# Altium PCB PCB-watch-V2.2.PcbDoc
Units mil, origin at the board's own origin, x right, y up, seen from the top; angles counter-clockwise.
Board outline 1043.31 x 1259.84 mil, 4 copper layers (Top Layer, GND, POWER, Bottom Layer), stack 23.756 mil thick; 99 components, 97 nets, 409 pads, 155 vias.
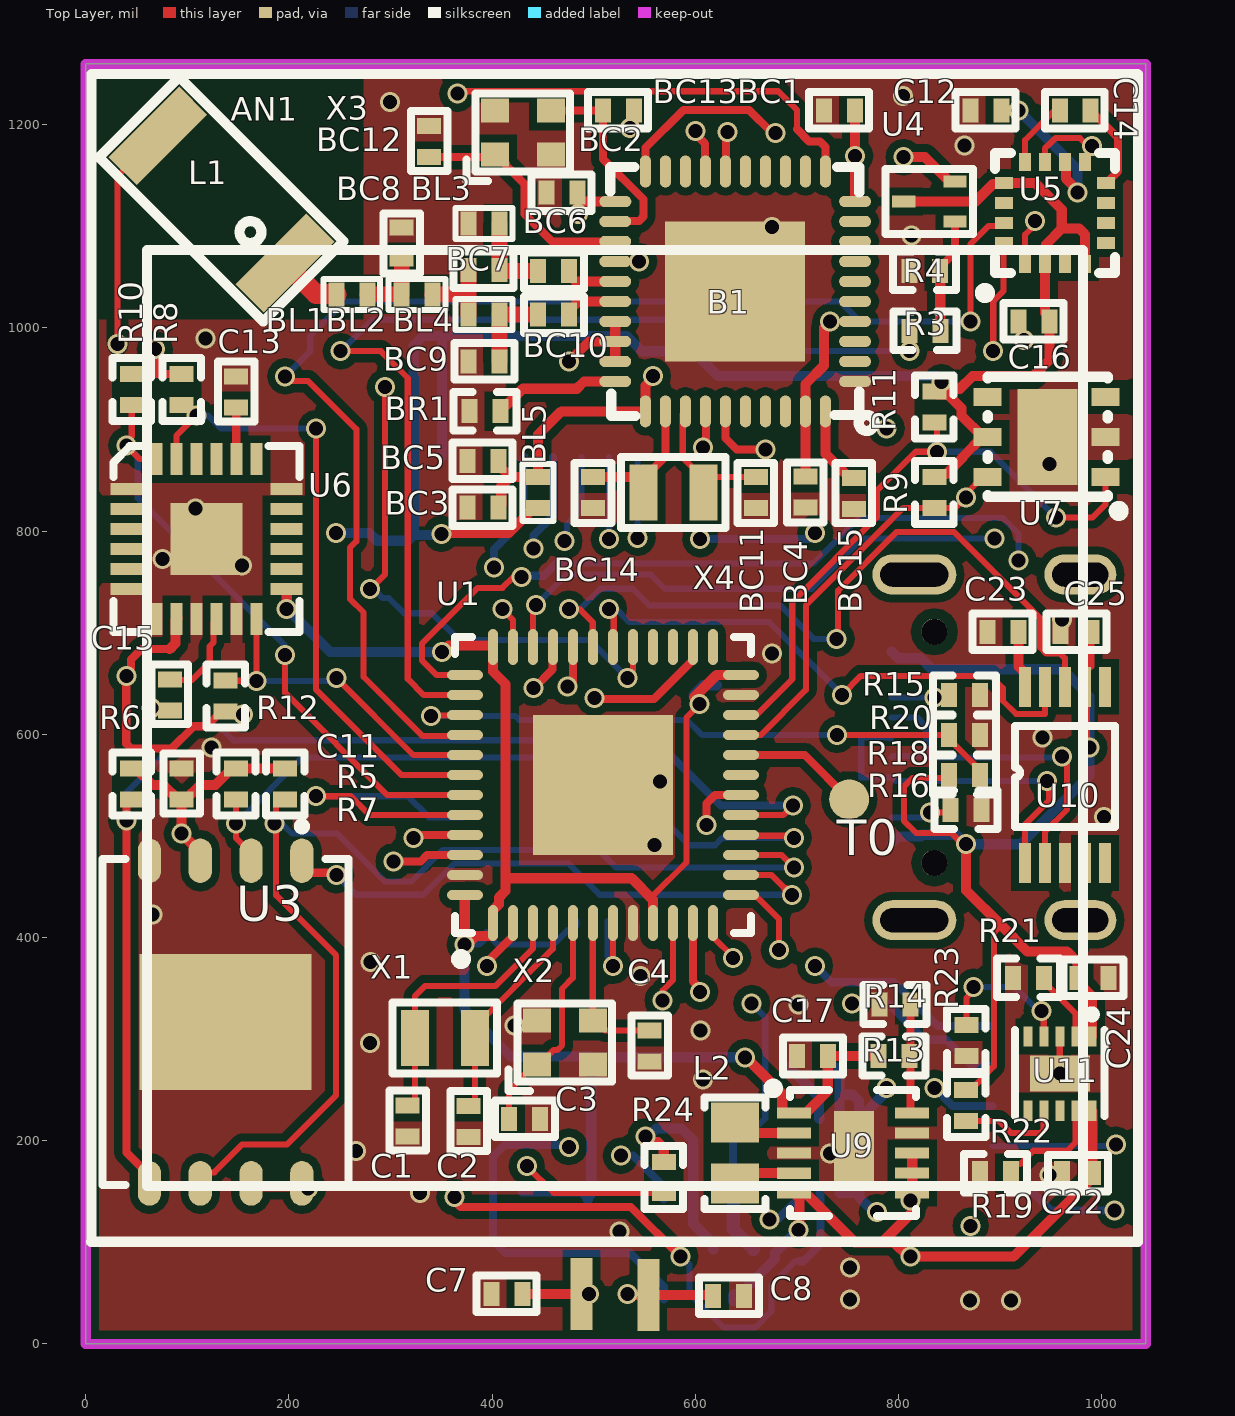
[diagram p0: Top Layer view]
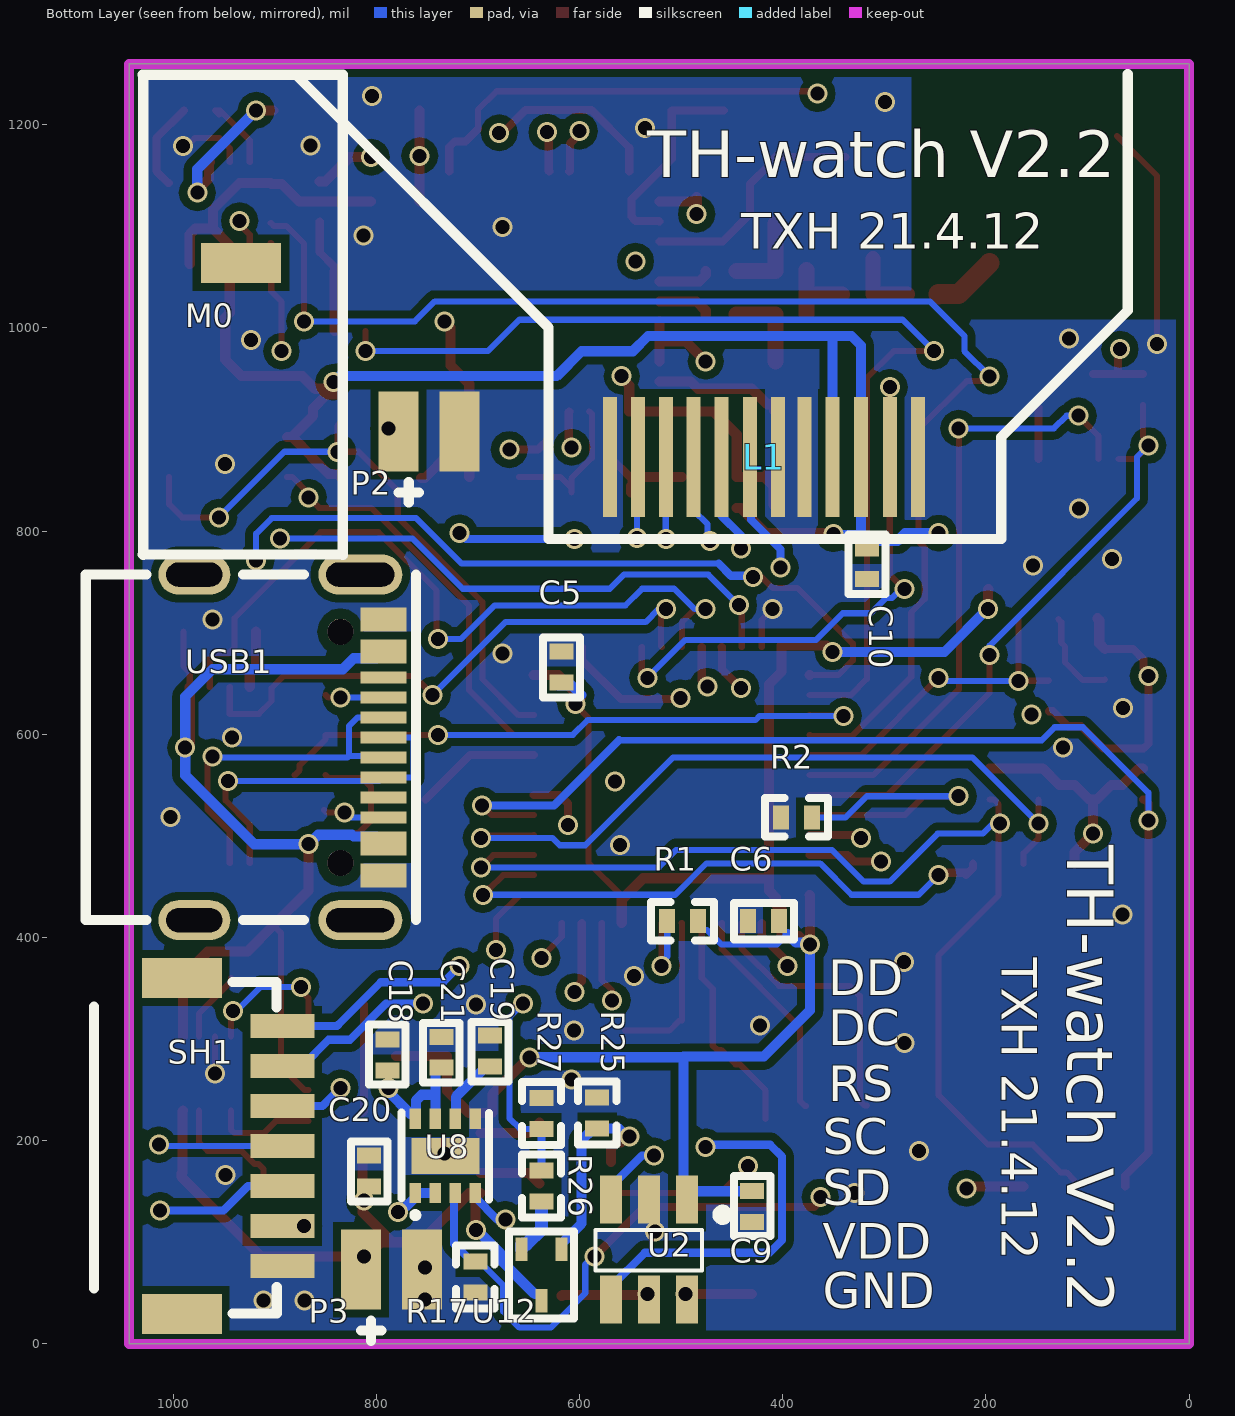
[diagram p1: Bottom Layer view, seen from below]
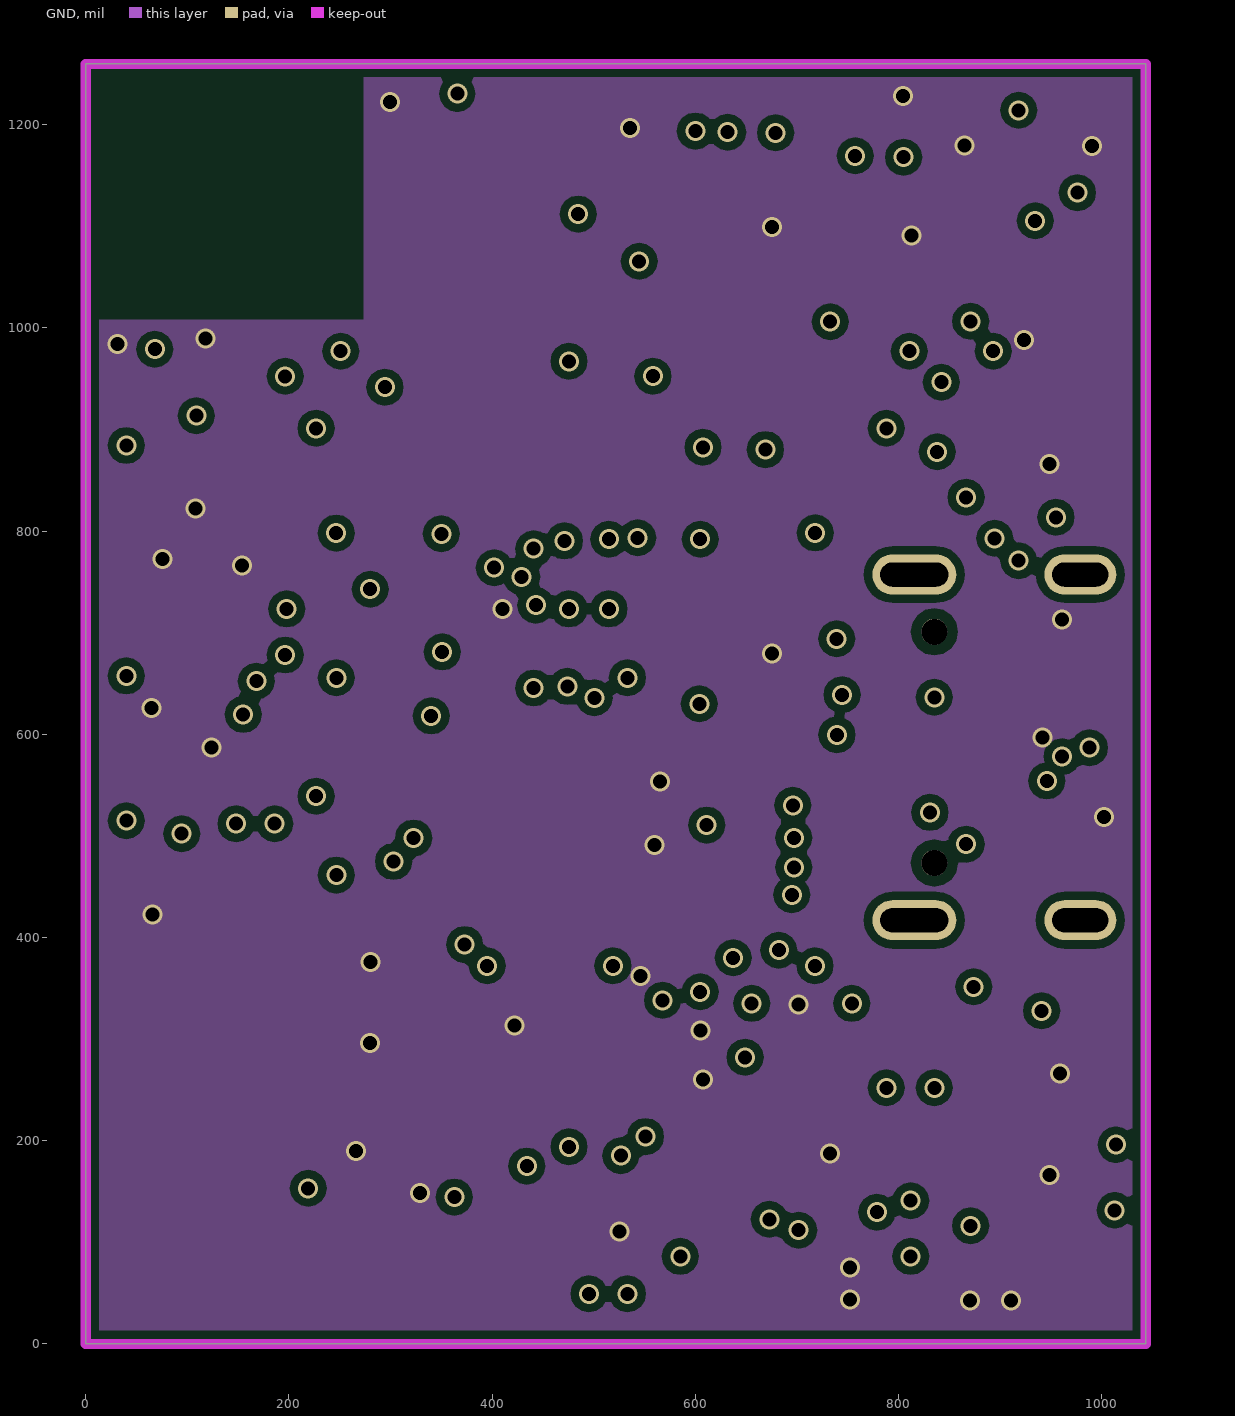
[diagram p2: GND]
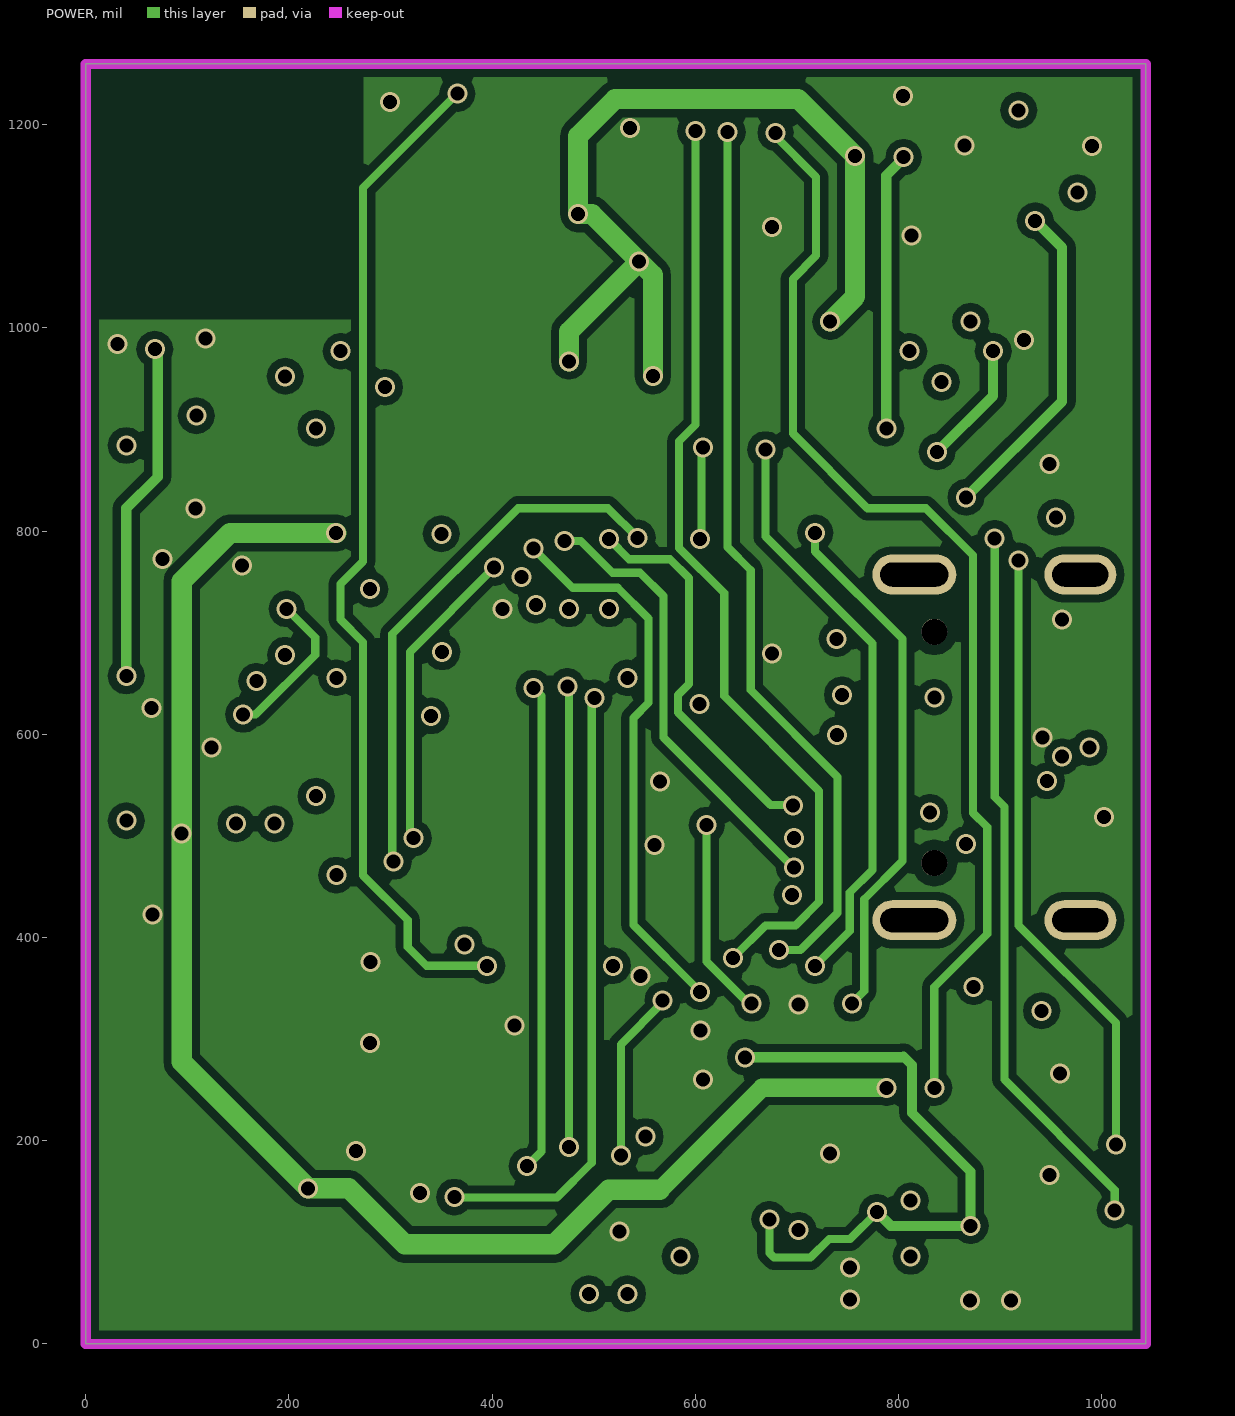
[diagram p3: POWER]
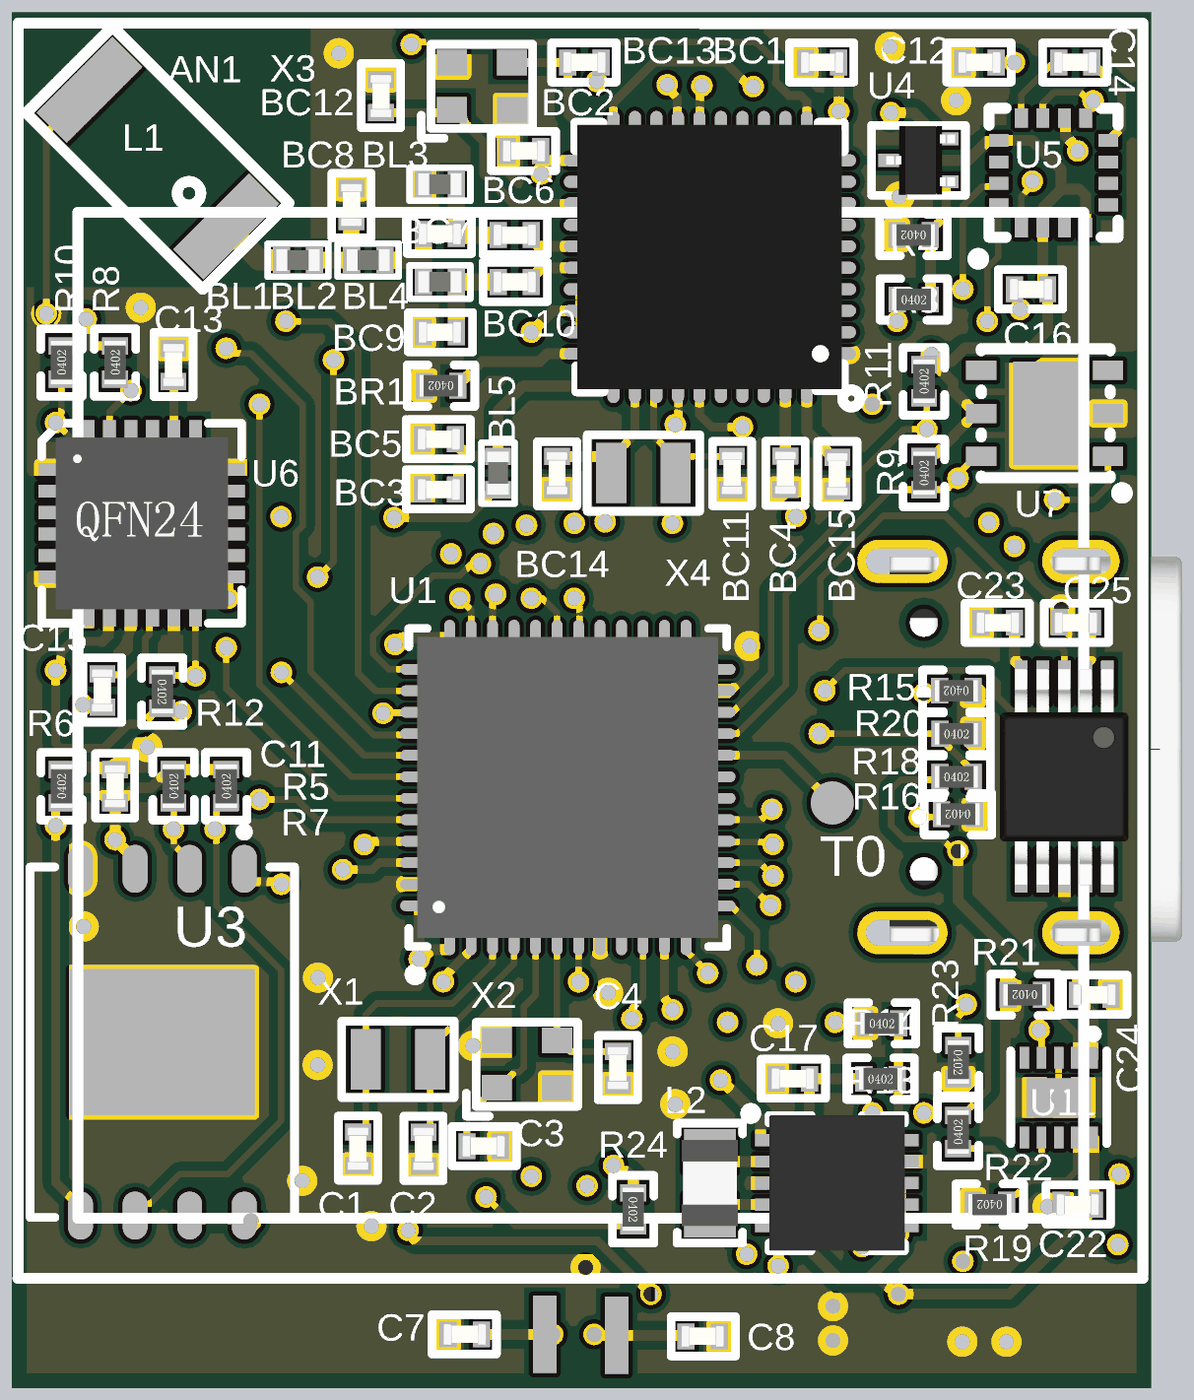
[diagram p4: 3D render of the assembled board from above, using the file's embedded part models]
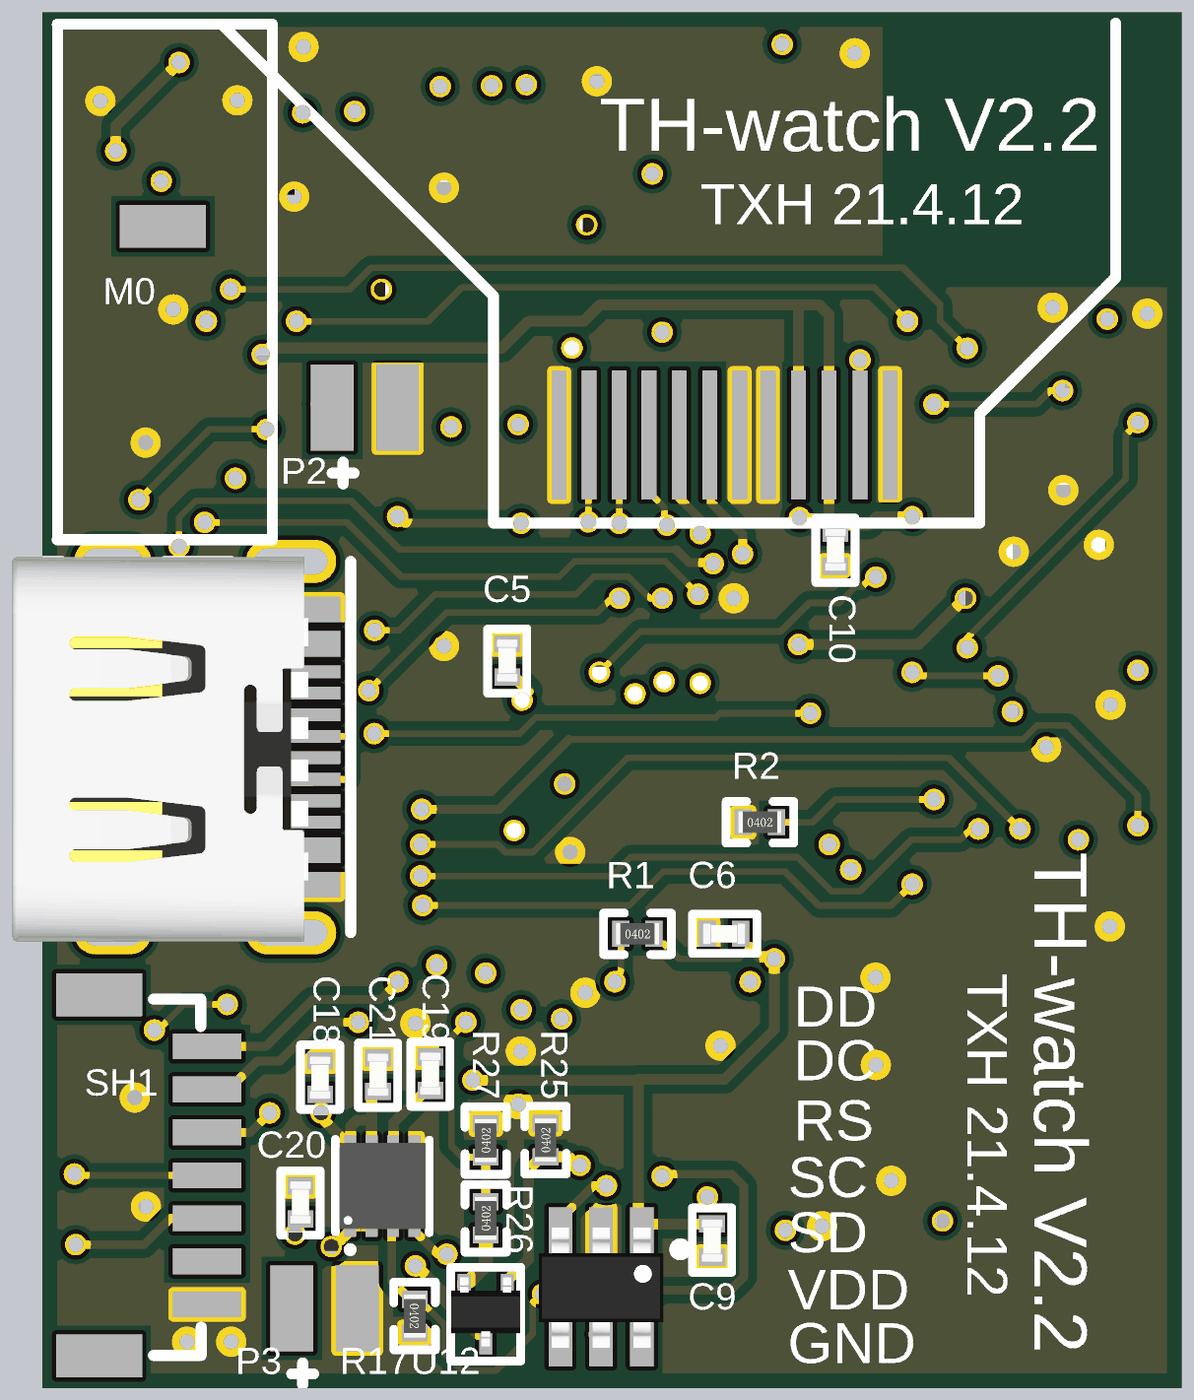
[diagram p5: 3D render of the assembled board from below, using the file's embedded part models]

## Layer stack, top to bottom
Top Solder: solder mask 0.4, Solder Resist, Dk 3.5
Top Layer: signal copper 1.4
Dielectric 2: prepreg 2.8, PP-006, Dk 4.1
GND: signal copper 1.378
Dielectric 1: dielectric 12.6, FR-4, Dk 4.8
POWER: signal copper 1.378
Dielectric 3: prepreg 2.8, PP-006, Dk 4.1
Bottom Layer: signal copper 1.4
Bottom Solder: solder mask 0.4, Solder Resist, Dk 3.5

## Board outline
0,0 0,1259.84 1043.31,1259.84 1043.31,0

## Design rules (kind name [scope] priority, off if disabled: settings)
Clearance [All] p1: gap=8 ignorepadtopadclearanceinfootprint=TRUE except(4: Arc-Arc Arc-Track Arc-SMDPad Arc-THPad Arc-Via Track-Track Track-SMDPad Track-THPad Track-Via SMDPad-SMDPad SMDPad-THPad SMDPad-Via THPad-THPad THPad-Via Via-Via; 10: Arc-Text Arc-Hole Track-Text Track-Hole SMDPad-Text SMDPad-Hole THPad-Text THPad-Hole Via-Text Via-Hole Fill-Text Fill-Hole Poly-Text Poly-Hole Region-Text Region-Hole Text-Text Text-Hole)
DiffPairsRouting [All] p1: maxlimit=10 minlimit=5.91 mostfreqgap=10 toplayer_minwidth=15 toplayer_maxwidth=15 toplayer_prefwidth=15 midlayer1_minwidth=15 midlayer1_maxwidth=15 midlayer1_prefwidth=15 midlayer2_minwidth=15 midlayer2_maxwidth=15 midlayer2_prefwidth=15 bottomlayer_minwidth=15 bottomlayer_maxwidth=15 bottomlayer_prefwidth=15 maxuncoupledlength=500
HoleToHoleClearance [All] p1: gap=5.91 allowstackedmicrovias=TRUE
MinimumSolderMaskSliver [All] p1: minsoldermaskwidth=0.39
PlaneConnect [All] p1: planeconnectstyle=Relief reliefexpansion=20 reliefentries=4 reliefconductorwidth=19.68 reliefairgap=10
PolygonConnect [All] p1: connectstyle=Direct reliefconductorwidth=15.75 reliefentries=4 polygonreliefangle="90 Angle" airgapwidth=5.91
RoutingVias [All] p1: holewidth=118.11 width=118.11 viastyle="Through Hole" minholewidth=9.84 minwidth=13.78 maxholewidth=118.11 maxwidth=118.11
SilkToSilkClearance [All] p1: silktosilkclearance=0
SilkToSolderMaskClearance [IsPad] p1: minsilkscreentomaskgap=0 clearancetoexposedcopper=TRUE
SolderMaskExpansion [All] p1: expansion=4
Width [All] p1: maxlimit=39.37 minlimit=3 preferedwidth=6
24 further rules are at their usual default settings.

## Classes and differential pairs
component class 04-POWERV2.2: C17 C18 C19 C20 C21 C22 C23 C24 C25 L2 P3 R13 R14 R15 R16 R17 R18 R19 R20 R21 R22 R23 R24 R25 R26 R27 U8 U9 U10 U11 U12 USB1
component class 03-PeripheralPart-V2.2: C7 C8 C9 C10 C11 C12 C13 C14 C15 C16 L1 M0 P2 R3 R4 R5 R6 R7 R8 R9 R10 R11 R12 U2 U3 U4 U5 U6 U7
component class 02-bluetooth-V2.2: AN1 B1 BC1 BC2 BC3 BC4 BC5 BC6 BC7 BC8 BC9 BC10 BC11 BC12 BC13 BC14 BC15 BL1 BL2 BL3 BL4 BL5 BR1 X3 X4
component class 01-MCU-V2.2: C1 C2 C3 C4 C5 C6 R1 R2 SH1 T0 U1 X1 X2

## Components (designator, comment, footprint, x,y, rotation, side; value= is the part's Value field where it differs from the comment)
AN1 "AN9520-245" AN-5120 196.27,1063.73 r135 top
B1 "CC2541" QFN40-CC254X 639.28,1035.84 r90 top
BC1 "100nF" CC1005-0402 742.09,1214 r180 top
BC2 "100nF" CC1005-0402 469,1133 r180 top
BC3 "220nF" CC1005-0402 391,823 r180 top
BC4 "100nF" CC1005-0402 708.43,838.24 r270 top
BC5 "10uF" CC1005-0402 391,869 r180 top
BC6 "18pF" CC1005-0402 460.47,1056 r0 top
BC7 "1pF" CC1005-0402 392,1057 r180 top
BC8 "1pF" CC1005-0402 311,1083.55 r270 top
BC9 "1pF" CC1005-0402 392,966.94 r0 top
BC10 "18pF" CC1005-0402 460.47,1013 r0 top
BC11 "15pF" CC1005-0402 659.56,838 r270 top
BC12 "27pF" CC1005-0402 338,1183.24 r90 top
BC13 "27pF" CC1005-0402 524.39,1214 r180 top
BC14 "15pF" CC1005-0402 499.32,837.83 r270 top
BC15 "100pF" CC1005-0402 756,836.96 r90 top
BL1 "1nH" Inductor-0402 262,1033 r0 top
BL2 "1nH" Inductor-0402 326.24,1033 r0 top
BL3 "2nH" Inductor-0402 392,1102.47 r0 top
BL4 "2nH" Inductor-0402 392,1013 r0 top
BL5 "2nH" Inductor-0402 445.24,838 r270 top
BR1 "56KR" CR1005-0402 393,918 r180 top
C1 "15pF" CC1005-0402 317,219.24 r90 top
C2 "15pF" CC1005-0402 377,219 r90 top
C3 "27pF" CC1005-0402 432,221.52 r0 top
C4 "27pF" CC1005-0402 555,293 r90 top
C5 "100nF" CC1005-0402 617.63,666.33 r270 bottom
C6 "100nF" CC1005-0402 419,416 r180 bottom
C7 "1pF" CC1005-0402 414.76,49.15 r180 top
C8 "1pF" CC1005-0402 632.66,47.3 r0 top
C9 "100NF" CC1005-0402 430,135 r90 bottom
C10 "100nF" CC1005-0402 317.01,767.81 r270 bottom
C11 "100nF" CC1005-0402 94.47,551.13 r90 top
C12 "4.7uF" CC1005-0402 886.2,1214 r180 top
C13 "2.2uF" CC1005-0402 148,937 r90 top
C14 "0.22uF" CC1005-0402 974,1214 r180 top
C15 "100NF" CC1005-0402 82.79,638.83 r90 top
C16 "100nF" CC1005-0402 933.45,1006.31 r180 top
C17 "10uF" CC1005-0402 715.2,283.28 r0 top
C18 "100nF" CC1005-0402 789,284.24 r90 bottom
C19 "100nF" CC1005-0402 688,288 r270 bottom
C20 "10uF" CC1005-0402 807,170 r270 bottom
C21 "10uF" CC1005-0402 736,287 r270 bottom
C22 "1uF" CC1005-0402 976.16,167.99 r0 top
C23 "100nF" CC1005-0402 902.98,700.86 r180 top
C24 "1uF" CC1005-0402 991.4,360.17 r0 top
C25 "100nF" CC1005-0402 974.51,700.86 r0 top
L1 "TFT LED" LCD-1.3-(2) 267,872.84 r180 top locked
L2 "3.3uH" Inductor-0805 639.28,187.69 r90 top
M0 "motor" motor 833,1249 r0 bottom
P2 "power" POWER-3.7V 793,848 r180 bottom
P3 "power" POWER-3.7V 830,23 r180 bottom
R1 "10K" CR1005-0402 498.36,416 r180 bottom
R2 "10K" CR1005-0402 386.24,518.18 r180 bottom
R3 "1K" CR1005-0402 826,997 r0 top
R4 "10K" CR1005-0402 825.86,1056 r180 top
R5 "47K" CR1005-0402 148,551.13 r90 top
R6 "47K" CR1005-0402 45.39,551.13 r90 top
R7 "47K" CR1005-0402 196.27,551.13 r90 top
R8 "10K" CR1005-0402 94.47,939.22 r90 top
R9 "10K" CR1005-0402 835.3,838 r90 top
R10 "10K" CR1005-0402 45.39,939.22 r90 top
R11 "10K" CR1005-0402 835.3,922 r90 top
R12 "10K" CR1005-0402 137.79,637.83 r270 top
R13 "1M" CR1005-0402 795.53,283.28 r0 top
R14 "178K" CR1005-0402 796.76,334 r0 top
R15 "1.5K" CR1005-0402 865,638.58 r180 top
R16 "1.5K" CR1005-0402 866.53,525.6 r180 top
R17 "10K" CR1005-0402 702.47,66 r270 bottom
R18 "10K" CR1005-0402 865.14,559.84 r0 top
R19 "10K" CR1005-0402 895.61,168.01 r180 top
R20 "10K" CR1005-0402 865.14,599.21 r0 top
R21 "1K" CR1005-0402 927.78,360.17 r180 top
R22 "1K" CR1005-0402 866.53,234.47 r90 top
R23 "2K" CR1005-0402 866.78,298.52 r270 top
R24 "1K" CR1005-0402 569,163.72 r270 top
R25 "10K" CR1005-0402 582.5,227.06 r90 bottom
R26 "10K" CR1005-0402 637.32,155.44 r90 bottom
R27 "10K" CR1005-0402 637.32,226.71 r90 bottom
SH1 "SH1.0-7P" SH1.0-7P 925.65,234.18 r270 bottom
T0 "测试点" 测试点 751.44,535.86 r0 top
U1 "STM32L431CCU6" STM32-UFQFPN48_N 509.16,550 r90 top locked
U2 "BS812A-1" SOT23-6 529.2,92 r0 bottom
U3 "W25Q64JVEIQ" WSON-8_L8.0-W6.10-P1.27-TL-EP 137.79,316.73 r270 top
U4 "MMBT3904TT1G" SOT-416 830.3,1124.43 r0 top
U5 "HMC5883L" LPCC-16_L3.0-W3.0-P0.50-BL 954,1113 r0 top
U6 "MPU6050" "QFN24 - duplicate" 118.82,792.01 r0 top
U7 "SI7020" DFN-6 945.84,892.64 r90 top
U8 "TPS22965" UDFN-8 732,185 r90 bottom
U9 "TPS63000" SON10 697.59,225.55 r0 top
U10 "CH340E" MSOP-10 924.47,473.3 r90 top
U11 "BQ24040" WSON-10_L2.0-W2.0-P0.40-BL-EP 958.77,266 r270 top
U12 "MMBT3904TT1G" SOT-416 637.31,67.7 r90 bottom
USB1 "Tpye-c 16P" "TYPE-C 16P" 835.3,473.3 r270 bottom locked
X1 "32.768Khz" XTAL-2012 383.06,301 r180 top
X2 "32Mhz" XTAL-2016 444.2,275 r0 top
X3 "32Mhz" XTAL-2016 402.88,1170.69 r0 top
X4 "32.768Khz" XTAL-2012 548.94,838 r0 top

## Footprints (in the part's own frame and the unit in brackets; to place one, negate y for a bottom-side part, rotate by r counter-clockwise, add the part's x,y. Pads: shape width x height; smd on the part's side, far side on the other; paste and mask are expansions set on the pad)
AN-5120 [mm]
  rect 1x2.5 smd: 1(0,0) 2(4.5,0)
  silkscreen extent -0.65,-1.42 5.16,1.42, body extent -0.32,-1.03 4.77,1.03, height 1.2
CC1005-0402 [mm]
  rect 0.4x0.6 smd: 1(-0.387,0) 2(0.387,0)
  silkscreen extent -0.74,-0.46 0.76,0.46, body extent -0.5,-0.25 0.5,0.25, height 0.3
CR1005-0402 [mm]
  rect 0.4x0.6 smd: 1(-0.387,0) 2(0.387,0)
  silkscreen extent -0.79,-0.48 0.79,0.48, body extent -0.5,-0.25 0.5,0.25, height 0.35
DFN-6 [mm]
  rect 0.45x0.701 smd: 1(-1.001,-1.476) 2(0,-1.476) 3(1.001,-1.476) 4(1.001,1.476) 5(0,1.476) 6(-1.001,1.476)
  rect 2.4x1.5 smd: 7(0,-0.025)
  silkscreen extent -1.95,-1.9 1.5,1.47, body extent -1.52,-1.55 1.5,1.47, height 1
Inductor-0402 [mm]
  rect 0.4x0.6 smd: 1(-0.387,0) 2(0.387,0)
  silkscreen extent -0.71,-0.39 0.71,0.39, body extent -0.5,-0.25 0.5,0.25, height 0.25
Inductor-0805 [mm]
  rect 1x1.2 smd: 1(-0.762,0) 2(0.762,0)
  silkscreen extent -1.4,-0.76 1.4,0.76, body extent -1,-0.65 1,0.66, height 0.73
LCD-1.3-(2) [mm]
  rect 0.35x3 smd far side: 1(0,0) 2(-0.7,0) 3(-1.419,0) 4(-2.128,0) 5(-2.838,0) 6(-3.5,0) 7(-4.193,0) 8(-4.902,0) 9(-5.612,0) 10(-6.3,0) 11(-7,0) 12(-7.7,0)
  silkscreen extent -19.53,-9.58 6.64,19.62, body extent -19.52,-9.58 6.67,19.58, height 1.85
LPCC-16_L3.0-W3.0-P0.50-BL [mm]
  rect 0.3x0.45 smd: 1(-0.749,-1.275) 2(-0.249,-1.275) 3(0.251,-1.275) 4(0.751,-1.275) 9(0.75,1.275) 10(0.25,1.275) 11(-0.25,1.275) 12(-0.749,1.275)
  rect 0.45x0.3 smd: 5(1.275,-0.748) 6(1.275,-0.248) 7(1.275,0.252) 8(1.275,0.752) 13(-1.275,0.752) 14(-1.275,0.252) 15(-1.275,-0.248) 16(-1.275,-0.748)
  silkscreen extent -1.87,-2.12 1.5,1.5, body extent -1.42,-1.48 1.42,1.42, height 0.9
motor [mm]
  rect 2x1 smd: 3(2.54,4.699)
  silkscreen extent 0,0 5,12, body extent 0,0.03 4.95,11.96, height 4.9
MSOP-10 [mm]
  rect 1x0.3 smd: 1(0,0) 2(0,-0.5) 3(0,-1) 4(0,-1.5) 5(0,-2) 6(4.403,-2) 7(4.403,-1.5) 8(4.403,-1) 9(4.403,-0.5) 10(4.403,0)
  silkscreen extent 0.9,-2.25 3.42,0.25, body extent -0.32,-2.5 4.71,0.5, height 1.05
POWER-3.7V [mm]
  rect 1x2 smd: 1(0.381,1.27) 2(1.905,1.27)
  silkscreen extent 0.38,-0.51 0.89,0
"QFN24 - duplicate" [mm]
  rect 0.8x0.3 smd: 1(-2,1.25) 2(-2,0.75) 3(-2,0.25) 4(-2,-0.25) 5(-2,-0.75) 6(-2,-1.25) 13(2,-1.25) 14(2,-0.75) 15(2,-0.25) 16(2,0.25) 17(2,0.75) 18(2,1.25)
  rect 1.8x1.8 smd: 1(0.005,0)
  rect 0.3x0.8 smd: 7(-1.25,-2) 8(-0.75,-2) 9(-0.25,-2) 10(0.25,-2) 11(0.75,-2) 12(1.25,-2) 19(1.25,2) 20(0.75,2) 21(0.25,2) 22(-0.25,2) 23(-0.75,2) 24(-1.25,2)
  silkscreen extent -2.32,-2.32 2.32,2.32, body extent -2,-2 2.01,2, height 0.9
QFN40-CC254X [mm]
  oval 0.28x0.8 smd: 1(-2.25,-2.998) 2(-1.75,-2.998) 3(-1.25,-2.998) 4(-0.75,-2.998) 5(-0.25,-2.998) 6(0.25,-2.998) 7(0.75,-2.998) 8(1.25,-2.998) 9(1.75,-2.998) 10(2.25,-2.998) 21(2.246,2.996) 22(1.75,2.998) 23(1.25,2.998) 24(0.75,2.998) 25(0.25,2.998) 26(-0.25,2.998) 27(-0.75,2.998) 28(-1.25,2.998) 29(-1.75,2.998) 30(-2.25,2.998)
  oval 0.8x0.28 smd: 11(2.998,-2.256) 12(2.998,-1.756) 13(2.998,-1.256) 14(2.998,-0.756) 15(2.998,-0.256) 16(2.998,0.244) 17(2.998,0.744) 18(2.998,1.244) 19(2.998,1.744) 20(2.998,2.244) 31(-2.998,2.244) 32(-2.998,1.744) 33(-2.998,1.244) 34(-2.998,0.744) 35(-2.998,0.244) 36(-2.998,-0.256) 37(-2.998,-0.756) 38(-2.998,-1.256) 39(-2.998,-1.756) 40(-2.998,-2.256)
  rect 3.5x3.5 smd: 41(0,0)
  silkscreen extent -3.49,-3.49 3.11,3.12, body extent -3.08,-3.07 3.07,3.08, height 1.08
SH1.0-7P [mm]
  rect 0.6x1.6 smd: 1(-2,0.844) 2(-1,0.844) 3(0,0.844) 4(1,0.844) 5(2,0.844) 6(3,0.844) 7(4,0.844)
  rect 1x2 smd: 8(-3.2,-1.67) 9(5.2,-1.67)
  silkscreen extent -3.1,-3.87 5.19,0.7, body extent -3.15,-3.89 5.18,0.69, height 3
SON10 [mm]
  rect 0.85x0.28 smd: 1(-0.005,0.038) 2(-0.005,-0.461) 3(-0.005,-0.962) 4(-0.005,-1.462) 5(-0.005,-1.962) 6(2.945,-1.962) 7(2.945,-1.462) 8(2.945,-0.962) 9(2.945,-0.461) 10(2.945,0.038)
  rect 1x2 smd: 9(1.483,-0.903)
  silkscreen extent -0.65,-2.54 3.04,0.78, body extent -0.09,-2.54 3.06,0.61, height 1
SOT23-6 [mm]
  rect 0.55x1.2 smd: 1(-0.889,-1.27) 2(0.061,-1.27) 3(1.011,-1.27) 4(1.011,1.23) 5(0.061,1.23) 6(-0.889,1.23)
  silkscreen extent -1.9,-1.02 1.4,0.51, body extent -1.39,-1.4 1.51,1.4, height 1.45
SOT-416 [mm]
  rect 0.585x0.301 smd: 1(0.642,-0.5) 2(0.642,0.5) 3(-0.642,0)
  silkscreen extent -1.09,-0.81 1.09,0.81, body extent -0.75,-0.8 0.85,0.8, height 0.78
STM32-UFQFPN48_N [mm] "QFN, 48-Leads, Body 7.1x7.1mm, Pitch 0.5mm, Thermal Pad 5.6x5.6mm, IPC Medium Density"
  oval 0.9x0.25 smd: 1(-3.45,2.75) 2(-3.45,2.25) 3(-3.45,1.75) 4(-3.45,1.25) 5(-3.45,0.75) 6(-3.45,0.25) 7(-3.45,-0.25) 8(-3.45,-0.75) 9(-3.45,-1.25) 10(-3.45,-1.75) 11(-3.45,-2.25) 12(-3.45,-2.75) 25(3.45,-2.75) 26(3.45,-2.25) 27(3.45,-1.75) 28(3.45,-1.25) 29(3.45,-0.75) 30(3.45,-0.25) 31(3.45,0.25) 32(3.45,0.75) 33(3.45,1.25) 34(3.45,1.75) 35(3.45,2.25) 36(3.45,2.75)
  oval 0.25x0.9 smd: 13(-2.75,-3.45) 14(-2.25,-3.45) 15(-1.75,-3.45) 16(-1.25,-3.45) 17(-0.75,-3.45) 18(-0.25,-3.45) 19(0.25,-3.45) 20(0.75,-3.45) 21(1.25,-3.45) 22(1.75,-3.45) 23(2.25,-3.45) 24(2.75,-3.45) 37(2.75,3.45) 38(2.25,3.45) 39(1.75,3.45) 40(1.25,3.45) 41(0.75,3.45) 42(0.25,3.45) 43(-0.25,3.45) 44(-0.75,3.45) 45(-1.25,3.45) 46(-1.75,3.45) 47(-2.25,3.45) 48(-2.75,3.45)
  rect 3.5x3.5 smd: 49(0,0)
  silkscreen extent -4.47,-3.7 3.7,3.7, body extent -3.5,-3.5 3.5,3.5, height 0.55
"TYPE-C 16P" [mm]
  oval 1x2.099 hole 0.6 slot 1.7 at 90 deg: 1(-7.21,0.5) 2(1.43,0.5)
  oval 1x1.799 hole 0.6 slot 1.4 at 90 deg: 3(-7.21,-3.65) 4(1.43,-3.65)
  rect 0.6x1.15 smd: A1B12(-6.09,1.075) A4B9(-5.29,1.075) B1A12(0.31,1.075) B4A9(-0.49,1.075)
  rect 0.3x1.15 smd: A5(-4.14,1.075) A6(-3.14,1.075) A7(-2.64,1.075) A8(-1.64,1.075) B5(-1.14,1.075) B6(-2.14,1.075) B7(-3.64,1.075) B8(-4.64,1.075)
  round 0.65 hole 0.65 unplated: ""(-5.78,0) ""(0,0)
  silkscreen extent -7.21,-6.37 1.43,1.89, body extent -7.31,-6 1.63,0.9, height 3.18
UDFN-8 [mm]
  rect 0.505x0.28 smd: 1(-0.928,0.75) 2(-0.928,0.25) 3(-0.928,-0.25) 4(-0.928,-0.75) 5(0.928,-0.75) 6(0.928,-0.25) 7(0.928,0.25) 8(0.928,0.75)
  rect 0.9x1.7 smd: 9(0,0)
  silkscreen extent -1.55,-1.09 1.09,1.09, body extent -1,-1 1,1, height 0.59
WSON-8_L8.0-W6.10-P1.27-TL-EP [mm]
  oval 1.115x0.581 smd: 1(-4.033,1.905) 2(-4.033,0.635) 3(-4.033,-0.635) 4(-4.033,-1.905) 5(4.033,-1.905) 6(4.033,-0.635) 7(4.033,0.635) 8(4.033,1.905)
  rect 3.4x4.3 smd: 4(0,0)
  silkscreen extent -4.99,-3.08 4.08,3.08, body extent -4.06,-3.1 4.06,3.1, height 1.2
WSON-10_L2.0-W2.0-P0.40-BL-EP [mm]
  rect 0.505x0.224 smd: 1(-0.928,0.8) 2(-0.928,0.4) 3(-0.928,0) 4(-0.928,-0.4) 5(-0.928,-0.8) 6(0.928,-0.8) 7(0.928,-0.4) 8(0.928,0) 9(0.928,0.4) 10(0.928,0.8)
  rect 0.9x1.5 smd: 11(0,0)
  silkscreen extent -1.58,-1.12 1.07,1.12, body extent -1.1,-1.1 0.97,1.1, height 0.81
XTAL-2012 [mm]
  rect 0.7x1.4 smd: 1(0,0) 2(1.5,0)
  silkscreen extent -0.56,-0.89 2.06,0.89, body extent -0.21,-0.69 1.76,0.69, height 0.55
XTAL-2016 [mm] "缺的角在右边"
  rect 0.7x0.6 smd: 1(0,0) 2(1.4,0) 3(1.4,1.1) 4(0,1.1)
  silkscreen extent -0.71,-0.66 1.88,1.52, body extent -0.27,-0.24 1.69,1.4, height 0.55
测试点 [mm]
  round 1 smd: 1(0,0)

## Part data
AN1: "2.4G全向天线 蓝牙天线 陶瓷贴片 WIFI内置"
B1: "低功耗蓝牙芯片"
BC1 BC2 BC3 BC4 BC5 BC6 BC7 BC8 BC9 BC10 BC11 BC12 BC13 BC14 BC15 C1 C2 C3 C4 C5 C6 C7 C8 C9 C10 C11 C12 C13 C14 C15 C16 C17 C18 C19 C20 C21 C22 C23 C24 C25: library part "Chip capacitor", "贴片电容"
BL1 BL2 BL3 BL4 BL5: library part Inductor-0402, "0402封装的电感"
BR1 R1 R2 R3 R4 R5 R6 R7 R8 R9 R10 R11 R12 R13 R14 R15 R16 R17 R18 R19 R20 R21 R22 R23 R24 R25 R26 R27: library part "Chip resistor", "贴片电阻"
L1: library part LCD-IPSscreen-1.3, "1.3寸显示屏幕"
L2: library part "Chip inductor", "贴片电感"
M0: "震动马达"
SH1: "间距为1mm的端子"
U1: "stm32低功耗单片机 主频80MHz"
U2: "触摸按键 两路 SOP23-6封装极简电路"
U3: library part W25Q256JVEIQ, "FLASH"
U4 U12: "NPN 电流 - 集电极（Ic）（最大值）：200mA 电压 - 集射极击穿（最大值）：40V SOT-23-3"
U5: "三轴罗盘"
U6: "陀螺仪"
U7: "温湿度传感器芯片"
U8: "DFN-8 功率开关芯片 TPS22965DSGR"
U9: "宽电压电源转换芯片输出3.3V输入1V至6V"
U10: "usd转串口芯片 MSOP10封装"
U11: library part BQ24041, "1A 具有自动启动功能的单输入，单节锂离子和锂聚合物电池充电 / 器"
USB1: "16P 封装的TYPE -c接口 4固定插脚 双向"
X1 X4: library part "XTAL 2012", "2012封装的时钟晶振"
X2 X3: library part "XTAL 2016", "2016封装的晶振"

## Free pads (board coordinates)
  rect 21.65x70.87 smd: 2(488,49.15) 2(553.81,48.22)

## Via types
v1: diameter 19.68, hole 13.78, Top Layer to Bottom Layer, 155 vias

## Nets (pads, with @x,y where several pads share a name; then routed paths per layer and width w, separated by ;. In a path a pad name is that pad's centre, name@x,y a point inside that pad or via, vN(x,y) a via of type N, cw(c..) or ccw(c..) an arc to the next point about the centre after c; other vN are vias at no path point)
3.3V: BL5.2 C10.1 C11.1 C16.1 C18.1 C21.2 L1.3 L1.4 R5.2 R6.2 R7.2 R9.2 R11.2 U3.3 U3.7 U3.8 U4.3 U5.2 U5.4 U5.13 U7.5 U8.7 U8.8 | length 3629.5
  Top Layer w10: R6.2 49.32,566.37 65.69,550 76.43,550 90.54,535.9 C11.1 ; U3.3@112.79,472.52 112.79,483.8 v1(94.47,502.12) C11.1 ; U3.7@162.79,154.98 U3.8@212.79,154.98 ; R7.2 R5.2 144.06,566.37 127.69,550 112.51,550 98.41,535.9 C11.1 ; v1@351,798 416.54,798 441.3,822.76 BL5.2 ; U4.3 876.01,1124.43 893.28,1141.7 902.9,1141.7 U5.13 934.55,1142.61 960.74,1116.42 960.74,1098.11 960.97,1097.88 ; R9.2 838.18,856.11 847.07,856.11 863,872.05 863,872.84 U7.5@882.8,892.64 ; v1(842.11,946.61) R11.2@842.11,940.11 ; U7.5 U7.5@882.8,892.64 ; U5.4 983.59,1092.02 977.73,1097.88 960.97,1097.88 ; R11.2@842.11,940.11 860.43,940.11 872.79,952.47 932.49,952.47 948.69,968.67 C16.1 948.69,1010.25 944.22,1014.72 U5.2 945.12,1063.72 945.12,1082.02 960.97,1097.88 ; R11.2@842.11,940.11 839.24,937.24 R11.2 838.18,934.36 848.59,934.36 862.11,920.85 862.11,913.33 U7.5@882.8,892.64
  POWER w18: 565.33,151.57 665.76,252 v1(788.13,252)
  POWER w20: v1(246.5,798) 142,798 94.47,750.47 v1(94.47,502.12) 94.47,277.53 v1(219,153) 258.87,153 314,97.88 461.07,97.88 514.77,151.57 565.33,151.57
  Bottom Layer w10: v1(246.5,798) 279.27,798 286.86,790.4 317.01,790.4 322.87,796.26 ; L1.4 350.8,992 ; v1@351,798 350.9,798.1 v1(349.98,797.18) 349.06,796.26 322.87,796.26 ; C21.2 738.97,271.76 741.84,268.89 741.84,245.2 ; U8.7 741.84,245.2 ; v1@789,248.99 766.47,226.46 762.04,226.46 761.53,225.95 U8.8 761.02,222.03 761.02,239.34 755.16,245.2 741.84,245.2 ; v1(842.11,946.61) 836.25,952.47 622.47,952.47 597.94,977 547.51,977 532.51,992 350.8,992 ; 322.87,796.26 L1.3 322.87,982.63 332.24,992 350.8,992
5V: C24.1 C25.2 R18.1 R22.2 U10.7 U11.1 USB1.A4B9 USB1.B4A9 | length 1239.5
  Top Layer w6: R18.1 847.08,557.02 813.98,557.02 805.25,548.29 805.25,514.84 817.26,502.82 851.72,502.82 862.82,491.72 v1(866.53,491.72) ; R22.2 870.47,249.71 893.89,273.13 893.89,404.67 901.11,411.89 ; U10.7 983.52,660.42 989.75,666.65 C25.2
  Top Layer w10: v1(866.53,491.72) 866.53,446.47 901.11,411.89 927,386 966,386 976.16,375.84 C24.1 976.16,356.24 990.26,342.14 U11.1 ; U10.7 983.52,591.34 v1(988,586.86)
  Bottom Layer w6: v1@862.82,491.72 v1(866.53,491.72)
  Bottom Layer w10: USB1.B4A9 799.79,499.4 822.1,499.4 823.81,501.11 857.14,501.11 v1(866.53,491.72) 920.17,491.72 988,559.55 v1(988,586.86) 988,637.14 961.14,664 832.85,664 822.1,674.76 799.79,674.76 USB1.A4B9
ADC1_IN15: R26.2 R27.1 U1.18 | length 446.1
  Top Layer w8: v1(611.19,510.63) 611.19,531.77 619.57,540.16 U1.18
  POWER w8: v1(611.19,510.63) 611.19,376.27 651.54,335.91 v1@651.54,335
  Bottom Layer w6: R27.1 658.43,211.47 668.89,221.94 668.89,321.64 v1(655.53,335)
  Bottom Layer w8: R26.2 R27.1
BOOT0: R2.2 U1.44 | length 307.1
  Top Layer w6: v1(226.76,539) 261.13,539 279.66,520.47 U1.44
  Bottom Layer w6: v1(226.76,539) 317.13,539 337.95,518.18 R2.2
DEBUG_CLOCK: B1.34 SH1.2 | length 927.2
  Top Layer w8: v1(607.6,882.45) 610.59,885.44 610.59,917.22 B1.34
  POWER w8: v1(604.89,792) 606.24,793.35 606.24,881.09 v1(607.6,882.45) ; v1(718,798.1) 718,779.82 803.89,693.93 803.89,475.15 766.3,437.56 766.3,347.27 v1(754.03,335)
  Bottom Layer w8: v1(604.89,792) 711.9,792 v1(718,798.1) ; v1(754.03,335) 790.3,335 825.97,299.33 846.97,299.33 872.75,273.55 SH1.2
DEBUG_DATA: B1.35 SH1.1 | length 844.7
  Top Layer w8: B1.35 629.69,891.34 640.82,880.21 v1(669.06,880.21)
  POWER w8: v1(669.06,880.21) 669.06,794.51 774.37,689.21 774.37,466.51 752.06,444.21 752.06,406.35 v1(717.83,372.11)
  Bottom Layer w8: v1(717.83,372.11) 734.05,355.89 795.57,355.89 837.35,314.11 837.41,314.11 838.61,312.92 SH1.1
DM_USB-: U10.2 USB1.A7 USB1.B7 | length 360.9
  Top Layer w6: U10.2 944.15,504.16 965.89,525.89 965.89,582.11 961.78,578 v1(961,578)
  Bottom Layer w6: USB1.A7 794.13,578.38 827,578.38 ; USB1.B7 818.27,616.61 827,607.87 827,578.38 ; v1(961,578) 960.11,577.11 828.27,577.11 827,578.38
DOUP: B1.40 BC15.2 | length 79.5
  Top Layer w10: B1.40 728.12,876.14 752.06,852.2 BC15.2
DP_USB+: U10.1 USB1.A6 USB1.B6 | length 345.6
  Top Layer w6: U10.1 924.47,511.12 948.36,535.01 948.36,551.68 946.78,553.25 v1@946,553.25
  Bottom Layer w6: USB1.A6 792.06,596 791.14,596.92 763.34,596.92 763.34,557.55 USB1.B6 793.43,558 797.43,554 v1(946,554)
GET_VBAT: R24.2 U1.33 | length 673.8
  Top Layer w6: v1(434.24,175) 460.75,148.48 R24.2
  Top Layer w8: v1(440.95,645.5) 441.5,645.5 459.59,663.59 459.59,685.47 U1.33
  POWER w8: v1(434.24,175) 448.54,189.31 448.54,637.91 v1(440.95,645.5)
GND: AN1.2 B1.1 B1.41 BC1.2 BC2.2 BC3.2 BC4.2 BC5.2 BC8.1 BC9.1 BC11.2 BC12.2 BC13.1 BC14.2 BC15.1 BL3.1 BR1.2 C1.1 C2.1 C3.2 C4.1 C5.1 C6.1 C7.2 C8.2 C9.1 C10.2 C11.2 C12.2 C13.2 C15.1 C16.2 C17.1 C18.2 C19.1 C20.1 C21.1 C22.1 C23.2 C24.2 C25.1 L1.1 L1.5 L1.6 L1.12 P2.2 P3.2 R2.1 R4.2 R14.1 R15.1 R16.1 R17.2 R19.2 R20.2 R21.2 R23.2 R25.2 R27.2 SH1.7 U1.8 U1.23 U1.35 U1.47 U1.49 U2.2 U3.4 U5.9 U5.11 U6.1 U6.6 U6.7 U6.9 U6.11 U6.18 U7.2 U7.7 U8.5 U8.9 U9.3 U9.9 U10.3 U11.3 U11.11 USB1.A1B12 USB1.B1A12 X2.2 X2.4 X3.2 X3.4 | length 366.7
  Top Layer w6: v1(31.43,983.96) 31.43,1149.43 AN1.2 ; v1(410.15,723.3) 410.15,722.96 420.57,712.54 U1.35 ; U5.11 944.15,1176.62 947.67,1180.13 947.94,1180.13 954.5,1186.69 978.68,1186.69 986.56,1178.81 v1(990.26,1178.81) ; v1(958.77,266) U11.3
  other v1: 870.47,42.41 910.9,42.41 752.06,43.57 752.06,75 525.5,110.51 329.25,148.22 948.56,166.18 732.84,187.19 265.9,189.82 607.58,259.97 280.01,295.88 605.13,308.24 422.26,313.51 701.76,334 546.07,362.02 280.33,375.84 65.69,422.7 560,490.94 1002.31,518.77 565.06,553.31 124,587 942,597 65.01,625.74 675.51,679.67 961.14,713.06 153.72,765.94 75.78,772.26 108.26,822.36 948.86,865.91 923.49,987.87 118,989.51 812.75,1091.11 675.6,1099.34 864.78,1179.34 535.55,1196.76 299.34,1222.47 804.25,1228.31
HMC_DRDY: U1.40 U5.15 | length 1307.9
  Top Layer w6: v1(196.27,952.24) 200.98,947.53 219,947.53 266.39,900.14 266.39,789.76 260.12,783.49 260.12,733.24 273.44,719.92 273.44,656.43 331.76,598.11 372.23,598.11 U1.40 ; v1(870.96,1006.31) 870.96,1082.6 888.69,1100.33 900.9,1100.33 U5.15
  Bottom Layer w6: v1(196.27,952.24) 221.04,977 221.04,992.04 255.01,1026.01 742.29,1026.01 761.99,1006.31 v1(870.96,1006.31)
IIC1_SCL: R8.1 U1.42 U6.23 | length 612.4
  Top Layer w6: U6.23 89.29,893.83 v1(108.98,913.51) ; v1(226.76,901) 226.61,900.85 226.61,644.23 311,559.84 U1.42
  Bottom Layer w6: v1(108.98,913.51) 120.49,913.51 133,901 v1(226.76,901)
IIC1_SDA: R10.1 U1.43 U6.24 | length 604.1
  Top Layer w6: R10.1 45.39,893.28 40,887.9 v1(40,884.19) 53.45,870.75 U6.24 ; v1(196.27,678) 196.27,640.73 296.84,540.16 U1.43
  Bottom Layer w6: v1(40,884.19) 51.22,872.98 51.22,832.23 196.27,687.17 v1(196.27,678)
IIC2_SCL: R9.1 U1.21 U5.1 U7.6 | length 767.8
  Top Layer w6: U1.21 664.43,599.21 708.86,643.65 708.86,726.74 804.89,822.76 R9.1 856.11,822.76 v1(866.53,833.18) 866.53,836.96 882.8,853.24 U7.6 ; U5.1 924.52,1091.59 934.55,1101.61 v1(934.55,1105.32)
  POWER w10: v1(866.53,833.18) 961.05,927.7 961.05,1078.82 v1(934.55,1105.32)
IIC2_SDA: R11.1 U1.22 U5.16 U7.1 | length 847.7
  Top Layer w6: U1.22 660.12,618.9 695.4,654.18 695.4,730.07 778.8,813.47 778.8,839.57 817.23,878 v1(838,878) 838,904.07 R11.1 ; v1(893.28,977) 893.28,1026 903.34,1036.06 903.34,1083.08 U5.16 ; v1(955,813.47) 991.07,813.47 1003.94,826.34 U7.1
  POWER w10: v1(838,878) 893.16,933.16 893.16,976.88 v1(893.28,977)
  Bottom Layer w6: v1(838,878) 890.47,878 v1(955,813.47)
key-2: U1.32 U2.4 | length 857.8
  Top Layer w8: v1(474,647) 479.63,652.63 U1.32
  POWER w8: v1(474,647) 475.71,645.29 v1(475.71,193.93)
  Bottom Layer w8: v1(475.71,193.93) 473.75,195.89 412.19,195.89 400.81,184.51 400.81,101.95 413.17,89.6 535.77,89.6 569,56.37 U2.4
KEY_1_WKUP: U1.10 U2.3 | length 317.8
  Top Layer w6: v1(567.78,338.17) 567.78,347.78 578.06,358.06 U1.10
  POWER w8: v1(526.8,185.24) 526.8,294.8 567.78,335.78 v1(567.78,338.17)
  Bottom Layer w8: v1(526.8,185.24) 538.56,185.24 569,154.8 U2.3
LCD_DC: L1.7 U1.45 | length 475.1
  Top Layer w8: v1(322.68,497.83) 325.84,497.83 328.8,500.79 U1.45
  POWER w8: v1(322.68,497.83) 319.11,501.4 319.11,681.11 v1(402,764)
  Bottom Layer w8: v1(402,764) 402,782.11 431.03,811.14 431.03,871.81 L1.7
LCD_RES: L1.11 U1.46 | length 682
  Top Layer w8: v1(303,474.77) 329.78,474.77 336.12,481.1 U1.46
  POWER w8: v1(303,474.77) 301.79,475.97 301.79,698.65 425.5,822.36 514.21,822.36 543,793.57 v1(543.29,793.29)
  Bottom Layer w6: L1.11 543.01,872.42 543.29,872.12 v1(543.29,793.29)
MPU_INT: R12.1 U1.41 U6.12 | length 332.3
  Top Layer w6: R12.1@141.72,653.06 R12.1 138.17,652.68 166.89,652.68 168.03,653.82 U6.12 ; v1(246.76,655.44) 322.68,579.53 U1.41
  Bottom Layer w6: v1(168.03,652.3) 243.62,652.3 v1(246.76,655.44)
NetAN1_1: AN1.1 BL1.1 | length 63.2
  Top Layer w19.68: AN1.1 226.76,1033.24 246.52,1033.24 BL1.1
NetBC6_1: BC6.1 BC7.1 BL3.2 | length 84.5
  Top Layer w15.75: BL3.2 BC7.1 407.24,1056 BC6.1
NetBC7_2: BC7.2 BL2.2 BL4.1 | length 79.3
  Top Layer w15.75: BL2.2 376.76,1033 ; BL4.1 376.76,1033 ; BC7.2 376.76,1033
NetBC8_2: BC8.2 BL1.2 BL2.1 | length 69.1
  Top Layer w15: BL1.2 BL2.1 BC8.2
NetBC9_2: BC9.2 BC10.1 BL4.2 | length 84.1
  Top Layer w15.75: BC9.2 BL4.2 BC10.1
NetC7_1: C7.1 pad.2@488,49.15 U2.6 | length 58
  Top Layer w10: C7.1 pad.2@488,49.15
  other v1: 495.39,49.15
NetC8_1: C8.1 pad.2@553.81,48.22 U2.5 | length 85
  Top Layer w10: v1(533.24,49.15) 534.17,48.22 616.5,48.22 C8.1
NetC12_1: C12.1 U5.10 | length 157.1
  Top Layer w10: C12.1 v1(918.22,1214) ; U5.10 964.74,1162.29 964.74,1147.04 976.16,1135.62 v1(976.16,1133)
  Bottom Layer w10: v1(918.22,1214) 976.16,1156.05 v1(976.16,1133)
NetC13_1: C13.1 U6.20 | length 51.2
  Top Layer w8: C13.1 148.17,921.59 148.17,870.92 U6.20
NetC14_1: C14.1 U5.8 | length 87.8
  Top Layer w8: C14.1 1016.19,1187.05 1016.19,1154.06 1004.73,1142.61 U5.8
NetC14_2: C14.2 U5.12 | length 77.7
  Top Layer w6: U5.12 924.52,1184.63 C14.2@953.89,1214 ; C14.2@953.89,1214 C14.2 954.83,1210.06 954.83,1213.06 C14.2@953.89,1214
NetC15_2: C15.2 U6.10 | length 92.2
  Top Layer w6: C15.2 83.66,653.19 104.6,653.19 122.11,670.7 122.11,686.54 125.75,690.18 125.75,710.36 U6.10
NetC19_2: C19.2 U8.6 | length 67.7
  Bottom Layer w10: C19.2 691.94,272.76 721.64,243.06 721.64,222.03 U8.6
NetC23_1: C23.1 U10.10 | length 56.8
  Top Layer w10: C23.1 918.22,666.68 924.47,660.42 U10.10
NetL2_1: L2.1 U9.4 | length 62.4
  Top Layer w10: L2.1 649.58,167.99 U9.4
NetL2_2: L2.2 U9.2 | length 62.4
  Top Layer w10: L2.2 649.58,207.39 U9.2
NetP2_1: P2.1 U4.2 | length 333.5
  Top Layer w10: v1(805.01,1168) 826.12,1168 850.01,1144.12 U4.2
  POWER w10: v1@788,902 788,1149.88 805.01,1166.88 v1(805.01,1168)
  other v1: 788,901
NetR3_2: R3.2 R4.1 U4.1 | length 113.8
  Top Layer w8: R4.1 841.09,1059.94 855.6,1074.44 U4.1
  Top Layer w10: R4.1 841.17,1055.93 841.17,997.07 R3.2
NetR13_2: R13.2 R14.2 U9.10 | length 107.6
  Top Layer w8: R14.2 812,228.58 U9.10
NetR15_2: R15.2 USB1.A5 | length 49.4
  Top Layer w6: v1(835.24,636.29) 846.78,636.29 847.07,636 849.65,638.58 R15.2
  Bottom Layer w6: USB1.A5 v1@826.71,636.29
NetR16_2: R16.2 USB1.B5 | length 55.4
  Top Layer w6: v1(831,523) 848.69,523 849,523.31 R16.2
  Bottom Layer w6: USB1.B5 v1@827,518.18
NetR19_1: R19.1 U11.9 | length 109.6
  Top Layer w6: R19.1 910.85,171.95 915.72,176.82 919.66,176.82 932.84,190 966,190 974.51,198.51 U11.9
NetR21_1: R21.1 U11.2 | length 70.7
  Top Layer w6: R21.1 943.02,356.24 974.51,324.74 U11.2
NetR22_1: R22.1 U11.7 | length 101.4
  Top Layer w6: R22.1 899.06,219.24 910.9,207.39 939.5,207.39 943.02,210.91 U11.7
NetR23_1: R23.1 U11.4 | length 137.2
  Top Layer w6: R23.1 866.78,340.4 874,347.63 v1(874,351.33) ; U11.4 v1@943.02,322.64
  Bottom Layer w6: v1(874,351.33) 913.86,351.33 937.38,327.82 v1(940.82,327.82)
NetR24_1: R24.1 R25.1 U12.1 | length 206.8
  Top Layer w10: v1(550.95,204) 551.19,203.76 553.81,203.76 559.23,198.34 563.14,198.34 569,192.48 R24.1
  Bottom Layer w10: v1(550.95,204) 553.46,204 561.28,211.83 R25.1 586.44,211.83 597.94,200.32 597.94,118.28 617.63,98.59 U12.1
NetR26_1: R26.1 U12.2 | length 57.9
  Bottom Layer w13: R26.1 637.32,112.83 652.13,98.02 656.43,98.02 657,97.44 U12.2
NetT0_1: T0.1 U1.20 | length 124.5
  Top Layer w8: U1.20 707.78,579.53 T0.1
NRST: R1.1 U1.7 | length 88.2
  Top Layer w6: v1(519,372.11) U1.7
  Bottom Layer w6: R1.1 513.6,381.22 519,375.81 v1(519,372.11)
P00: B1.19
P01: B1.18
P04: B1.15
P05: B1.14
P06: B1.13
P07: B1.12
P11: B1.9
P12: B1.8
P13: B1.7
P14: B1.6
P15: B1.5
P16: B1.38
P17: B1.37
P20: B1.36
P23: B1.33 BC11.1 X4.2 | length 145.3
  Top Layer w6: B1.33 587.71,915.18 587.71,872.07 608,851.78 X4.2@608,842.46 ; X4.2 X4.2@608,842.46 ; BC11.1 618.78,853.24 X4.2@608,842.46
P24: B1.32 BC14.1 X4.1 | length 142
  Top Layer w8: X4.1@548.94,844.28 548.94,851.78 570.64,873.47 B1.32
  Top Layer w10: BC14.1 540.17,853.06 548.94,844.28 X4.1
PC14: C1.2 U1.3 X1.2 | length 272.6
  Top Layer w6: C1.2 319.13,234.47 324,239.35 X1.2 324,342.14 334.08,352.22 403.4,352.22 440.26,389.08 U1.3
PC15: C2.2 U1.4 X1.1 | length 215
  Top Layer w6: C2.2 378.18,234.24 383.06,239.11 X1.1 383.06,311.82 459.94,388.71 U1.4
PH0: C3.1 U1.5 X2.1 | length 223.4
  Top Layer w6: C3.1 416.76,249.54 442.23,275 X2.1 446.17,275 460.5,289.33 464.57,289.33 468.81,293.58 468.81,349.34 479.63,360.16 U1.5
PH1: C4.2 U1.6 X2.3 | length 155.9
  Top Layer w6: U1.6 499.11,413.97 499.11,318.51 X2.3 501.28,318.31 511.35,308.24 C4.2
RBLAS: B1.30 BR1.1 | length 127.4
  Top Layer w10: BR1.1 408.24,921.94 411.11,924.81 415.05,924.81 430.35,940.11 483.34,940.11 490.49,947.26 B1.30
RESET: B1.20 SH1.3 | length 1341.5
  Top Layer w8: B1.20 550.95,1177.24 588.27,1214.56 652.98,1214.56 675.54,1192 v1(679,1192)
  POWER w8: v1(679,1192) 679,1188.54 719,1148.54 719,1071.03 696.11,1048.14 696.11,895.86 769.61,822.36 827.25,822.36 873.4,776.21 873.4,522.61 887.42,508.59 887.42,403.23 835.24,351.05 v1(835.24,252)
  Bottom Layer w8: v1(835.24,252) 853.06,234.18 SH1.3
RF_N: B1.26 BC10.2 | length 53.2
  Top Layer w10: BC10.2 475.71,1016.94 484.77,1026 B1.26
RF_P: B1.25 BC6.2 | length 52.1
  Top Layer w10: BC6.2 475.71,1052.06 482.09,1045.68 B1.25
RXD: U1.31 U10.8 | length 736.9
  Top Layer w6: v1(475.71,723.3) 485.84,723.3 499.12,710.02 499.12,686.02 U1.31 ; v1(739.14,693.86) 740.59,695.32 740.59,741.49 797.97,798.86 854.81,798.86 939.5,714.17 939.5,685.47 945.61,679.37 959.28,679.37 963.84,674.81 U10.8
  Bottom Layer w6: v1(475.71,723.3) 486.9,723.3 506.79,743.19 538.27,743.19 554.68,726.77 683.57,726.77 716.48,693.86 v1(739.14,693.86)
SPI1_CS_FLASH: U1.14 U3.1 | length 584.2
  Top Layer w6: U1.14 675.22,461.42 v1@689.05,447.59
  Top Layer w8: U3.1@212.79,472.52 212.79,468.29 219.66,461.42 219.66,463.65 244.53,463.65 v1(246.76,461.42) ; v1@689.05,447.59 694.64,442 v1(695,442)
  Bottom Layer w6: v1(246.76,461.42) 266.18,442 332.24,442 363.13,472.9 474.96,472.9 505.85,442 v1(695,442)
SPI1_CS_LCD: L1.8 U1.11 | length 711.2
  Top Layer w8: U1.11 597.74,356.82 604.5,350.05 604.5,346.89 v1(604.89,346.51)
  POWER w8: v1(440.95,782.59) 479.35,744.19 523.68,744.19 554.13,713.74 554.13,631 539.11,615.98 539.11,412.29 v1(604.89,346.51)
  Bottom Layer w8: v1(440.95,782.59) 440.95,795.89 459.99,814.94 L1.8
SPI1_MISO: R5.1 U1.16 U3.2 | length 734.6
  Top Layer w6: R5.1 v1(148,512) 148,497.83 162.79,483.04 U3.2@162.79,472.52 ; U1.16 645.72,500.05 v1@694.95,500.05
  Bottom Layer w6: v1(148,512) 213.24,577.24 507.75,577.24 594.24,490.74 619.42,490.74 626.68,498 v1(697,498)
SPI1_MOSI: L1.10 R6.1 U1.17 U3.5 | length 1653.3
  Top Layer w6: U1.17 686.47,520.47 v1(696,530)
  Top Layer w8: R6.1 43.95,535.9 40.08,532.02 40.08,188.21 62.79,165.5 U3.5@62.79,154.98
  POWER w8: v1(515.03,792) 534.77,772.26 575.26,772.26 593.81,753.71 593.81,649.35 583.11,638.65 583.11,621.35 674.16,530.3 695.7,530.3 v1(696,530)
  Bottom Layer w6: v1(40,515) 40,542.43 104.46,606.89 132.24,606.89 145.02,594.11 560.97,594.11 ; v1(515.03,792) L1.10
  Bottom Layer w8: 560.97,594.11 625.08,530 v1(696,530)
SPI1_SCK: L1.9 R7.1 U1.15 U3.6 | length 1640.7
  Top Layer w6: U3.6@112.79,154.98 112.79,160.94 120.58,168.73 126.54,168.73 153.81,196 197.88,196 246.52,244.65 246.52,382.4 187.46,441.46 187.46,531.02 192.34,535.9 R7.1 ; U1.15 684.9,481.1 v1(697,469)
  POWER w8: v1(471.27,790.22) 487.27,790.22 518.56,758.93 545.74,758.93 568.61,736.06 568.61,596.85 696.46,469 v1(697,469)
  Bottom Layer w6: v1@186,519.18 203.07,502.12 247.52,502.12 294.76,454.88 320.28,454.88 351.64,486.23 504.69,486.23 521.93,469 v1(697,469) ; v1(471.27,790.22) 473.89,792.84 473.89,806.63 487.93,820.67 L1.9
  other v1: 186,512
SWCLK: SH1.4 U1.37 | length 1473
  Top Layer w6: U1.37 345.4,658.27 330.91,672.76 330.91,689.24 385.7,744.03 410.15,744.03 421.13,755 v1(429,755)
  Top Layer w10: U1.37 U1.37
  POWER w8: v1(918.22,770.83) 918.22,411.84 1014,316.05 v1(1014,196)
  Bottom Layer w6: 462.84,767.93 715.96,767.93 760.75,812.73 903,812.73 918.22,797.51 v1(918.22,770.83) ; SH1.4 1012.81,194.81 v1(1014,196)
  Bottom Layer w8: v1(429,755) 429.93,755.93 450.84,755.93 462.84,767.93
SWDIO: SH1.5 U1.34 | length 1373.6
  Top Layer w6: U1.34 440.26,724.26 v1(443,727)
  POWER w8: v1(894.76,792.84) 894.76,538.1 904.22,528.64 904.22,260.16 1012.81,151.57 v1(1012.81,131.38)
  Bottom Layer w6: v1(443,727) 473.16,757.16 556.18,757.16 570.15,743.19 714.82,743.19 764.47,792.84 v1(894.76,792.84)
  Bottom Layer w8: SH1.5 926.12,155.44 950.18,131.38 v1(1012.81,131.38)
SYS_ON: R17.1 U1.26 U8.3 | length 1265.7
  Top Layer w8: v1(362.84,144.46) 362.84,140.82 368.85,134.81 536.47,134.81 v1(585.29,86) ; v1(500.59,635.79) 501.82,634.55 559.26,634.55 597.74,673.03 U1.26
  POWER w8: v1@362.84,143.97 463.84,143.97 498.11,178.24 498.11,633.31 v1(500.59,635.79)
  Bottom Layer w6: v1@586.44,86 594.24,78.2 594.24,49.88 628.12,16 659.14,16 675,31.86 675,57.7 698.53,81.24 R17.1
  Bottom Layer w8: R17.1 706.41,81.24 723.36,98.19 723.36,147.28 U8.3
SYS_WKUP2: B1.11 U1.2 | length 1474.5
  Top Layer w6: v1(365.75,1230.56) 368,1232.81 681.6,1232.81 699.96,1214.45 699.96,1195.7
  Top Layer w8: v1(395.16,372.11) 397.39,374.35 397.39,378.2 420.57,401.38 U1.2 ; 699.96,1195.7 712.09,1183.57 722.69,1183.57 728.12,1178.15 B1.11
  POWER w8: v1(365.75,1230.56) 273.11,1137.92 273.11,770.15 250.89,747.93 250.89,712.79 273.11,690.57 273.11,460.89 317.01,416.99 317.01,390.66 335.55,372.11 v1(395.16,372.11)
TIM1_CH1: L1.2 U1.29 | length 526.7
  Top Layer w6: v1@280.33,742.79 294.56,757.02 v1(294.56,941.56) ; v1(533.24,655.44) 538.68,660.89 U1.29
  Bottom Layer w6: v1(280.01,742.79) 283.71,742.79 292.55,733.95 298.57,733.95 313.44,719.08 340.85,719.08 367.01,692.92 495.76,692.92 v1(533.24,655.44)
TIM2_CH1: R3.1 U1.38 | length 1041.6
  Top Layer w6: v1(250.89,977) 290.63,977 317,950.63 317,654.43 332.85,638.58 U1.38 ; v1(810.62,977) 810.76,977.14 R3.1
  Bottom Layer w6: v1(250.89,977) 281.89,1008 659.14,1008 690.14,977 v1(810.62,977)
TXD: U1.30 U10.9 | length 561.3
  Top Layer w6: v1(515.03,723.3) 519.74,718.59 519.74,686.56 U1.30 ; v1(744.48,638.79) 763.08,657.39 891.01,657.39 902.9,645.5 902.9,632.72 915.67,619.96 944.15,619.96 U10.9
  Bottom Layer w6: v1(515.03,723.3) 522,723.3 534.94,710.36 672.95,710.36 v1(744.48,638.79)
USART2_RX: B1.16 U1.13 | length 1003.9
  Top Layer w6: U1.13 658.82,441.73 682.27,418.28 v1(682.27,387.51)
  Top Layer w8: B1.16 630.27,1154.47 630.27,1191.04 v1(631.9,1192.66)
  POWER w8: v1(631.9,1192.66) 631.9,784.09 654.63,761.37 654.63,643.44 740.06,558 740.06,423.89 703.69,387.51 v1(682.27,387.51)
USART2_TX: B1.17 U1.12 | length 1016.4
  Top Layer w6: U1.12 617.43,400.63 637.32,380.74 v1(637.32,380)
  Top Layer w8: v1(600.17,1193.67) 600.17,1190.51 609.43,1181.24 609.43,1154.47 B1.17
  POWER w8: v1(600.17,1193.67) 600.17,904.56 584,888.39 584,783.35 628.49,738.86 628.49,637.51 721.84,544.16 721.84,435.15 698.52,411.84 669.15,411.84 v1(637.32,380) ; v1@636.66,379.34 v1@637,379
usb_in_sign: R18.2 R20.1 U1.39 | length 602.1
  Top Layer w6: v1@341.47,617.51 342.41,618.45 372.88,618.45 U1.39 ; v1(739.46,599.33) 849.78,599.33 R20.1 849.9,595.28 875.5,569.68 875.5,564.72 R18.2
  Bottom Layer w6: v1(340,618) 422.59,618 426.59,614 591.87,614 606.54,599.33 v1(739.46,599.33)
USB_M/SDA: B1.3
USB_P/SCL: B1.2
VBAT: C20.2 C22.2 P3.1 U9.5 U9.6 U9.7 U9.8 U11.10 U12.3 | length 656.8
  Top Layer w10: v1@702.47,112.83 702.47,143.23 U9.5 708.6,148.32 756.93,100 784,100 ; U9.8 U9.7 U9.6 813.52,129.52 784,100 ; U11.10 990.83,228.91 990.83,168.56 C22.2 991.4,164.06 913.34,86 v1(812,86) 809.38,86 795.38,100 784,100
  Bottom Layer w10: U12.3 637.32,48 638.24,48.93 643.83,48.93 678.42,83.51 678.42,89.6 701.65,112.83 v1@702.47,112.83
  other v1: 701.76,111.86 812,141
VCC1: B1.4 B1.10 B1.21 B1.24 B1.27 B1.28 B1.29 B1.31 B1.39 BC1.1 BC2.1 BC3.1 BC4.1 BC5.1 BL5.1 | length 1564.3
  Top Layer w10: BC3.1 409.11,825.87 409.11,844.28 418.06,853.24 ; BC5.1 406.24,865.06 418.06,853.24 ; v1(475.71,966.94) 495.39,986.63 B1.28 ; v1(484.77,1112.02) 484.5,1112.29 484.5,1128.8 489.04,1124.26 B1.21 ; B1.29 B1.28 ; B1.27 B1.28 ; v1(558.37,952.47) 558.37,950.63 550.95,943.21 B1.31 468.18,917.8 445.24,894.85 BL5.1 418.06,853.24 ; BC4.1 B1.39 708.43,944.77 726.86,963.2 726.86,1000.14 v1(732.84,1006.12) ; B1.10 v1(757.33,1169.21) BC1.1
  POWER w19.68: v1(475.71,966.94) 475.71,996.25 v1(544.83,1065.37) ; v1(558.37,952.47) 558.37,1051.83 v1(544.83,1065.37) ; v1(732.84,1006.12) 757.33,1030.61 v1(757.33,1169.21) 701.34,1225.2 521.2,1225.2 484.77,1188.77 v1(484.77,1112.02) 498.18,1112.02 v1(544.83,1065.37)
VDD-MCU: C5.2 C6.2 C9.2 C17.2 R1.2 R8.2 R10.2 R12.2 R13.1 SH1.6 U1.1 U1.9 U1.24 U1.36 U1.48 U2.1 U6.8 U6.13 U8.1 U8.2 U8.4 U9.1 | length 3526.4
  Top Layer w6: 558.29,437.23 558.29,440.82 591.21,473.74 591.21,616.14 604,628.93 v1(604,630)
  Top Layer w8: R10.2 69.93,954.45 ; v1(68,979) 69.93,977.07 69.93,954.45 ; 82.66,683.73 54.92,683.73 44.74,673.55 44.74,665.26 40,660.52 v1(40,657.35) 40,590.64 44.69,585.96 84.5,585.96 106.43,607.89 119.15,607.89 133.85,622.59 R12.2 ; R8.2 69.93,954.45
  Top Layer w10: 82.66,683.73 88.38,689.45 88.38,712.36 U6.8 U6.8@90.2,714.17 ; U6.13 197.88,742.47 v1(197.88,723.3) ; v1(350.8,681) 357,687.2 400.81,687.2 400.89,687.12 U1.36 400.97,685.75 400.97,661.8 413.27,649.5 413.27,458.2 ; U1.48 373.24,441.73 373.17,441.65 373.17,393.17 v1(373,393) 375.62,393 384.08,401.46 400.81,401.46 400.89,401.54 U1.1 400.89,426.81 406.65,432.57 406.65,439.2 413.27,445.81 413.27,458.2 ; U1.9 558.29,414.25 558.29,437.23 537.33,458.2 413.27,458.2 ; v1@598.6,636 620.79,658.19 644.91,658.19 U1.24 ; v1(649,282) 649.68,282 685.65,246.03 685.65,227.58 686.16,227.06 U9.1 708.6,227.06 730.43,248.89 C17.2 R13.1
  POWER w8: v1(154.96,619.48) 167.3,619.48 225.96,678.14 225.96,695.21 v1(197.88,723.3) ; v1(672.95,122.56) 672.95,89.59 677.64,84.9 713.54,84.9 731.85,103.2 752.48,103.2 v1(778.8,129.52)
  POWER w10: v1(40,657.35) 40,822.36 70.89,853.25 70.89,976.11 v1(68,979) ; v1(649,282) 804.25,282 805.01,282.76 813.35,274.42 813.35,227.27 870.96,169.66 v1(870.96,116.07) 792.25,116.07 v1(778.8,129.52)
  Bottom Layer w6: 395.16,403.46 405.62,393 460.12,393 474.31,407.19 478.25,407.19 483.12,412.06 R1.2
  Bottom Layer w8: v1(672.95,122.56) 680.98,122.56 702.47,144.05 U8.4
  Bottom Layer w10: v1(197.88,723.3) 198.46,723.3 240.76,681 v1(350.8,681) ; 395.16,403.46 386.55,394.85 374.85,394.85 v1(373,393) 373,328.2 418.44,282.76 497.6,282.76 ; C9.2 488.37,150.24 U2.1@494.2,144.41 ; U2.1 U2.1@494.2,144.41 ; 598.1,638.54 607.78,648.22 621.24,648.22 618.37,651.09 C5.2 ; v1(649,282) 498.36,282 497.6,282.76 ; U8.2 U8.1 761.53,144.05 769.89,135.69 ; U2.1@494.2,144.41 497.6,147.81 497.6,282.76
XOC_1: B1.22 BC13.2 X3.3 | length 201.9
  Top Layer w8: X3.3 BC13.2 509.16,1166.34 548.94,1126.55 548.94,1109.43 544.83,1105.32 521.81,1105.32 B1.22
XOC_2: B1.23 BC12.1 X3.1 | length 238.3
  Top Layer w8: BC12.1 400.19,1168 X3.1 404.85,1170.69 413.66,1161.88 413.66,1159.91 432,1141.57 432,1112.02 458.96,1085.06 B1.23
pads on no net: M0.3 SH1.8 SH1.9 U1.19 U1.25 U1.27 U1.28 U5.3 U5.5 U5.6 U5.7 U5.14 U6.2 U6.3 U6.4 U6.5 U6.14 U6.15 U6.16 U6.17 U6.19 U6.21 U6.22 U7.3 U7.4 U10.4 U10.5 U10.6 U11.5 U11.6 U11.8 USB1. USB1.1 USB1.2 USB1.3 USB1.4 USB1.A8 USB1.B8

## Polygon pours and split planes (outlines as drawn)
GND on GND "Top Layer-No Net1" (solid, pour order 1): 0,0 0,1259.84 1043.31,1259.84 1043.31,0
GND on POWER "Top Layer-No Net2" (solid, pour order 2): 0,0 0,1259.84 1043.31,1259.84 1043.31,0
GND on Bottom Layer "Top Layer-No Net3" (solid, pour order 3): 0,0 0,1259.84 1043.31,1259.84 1043.31,0
GND on Top Layer "Top Layer-No Net" (solid, pour order 0): 0,0 0,1259.84 1043.31,1259.84 1043.31,0

## Keep-outs
Keep-Out Layer:
  the board outline again, w10

## Other copper
Top Layer:
  pour cut-out: 280.13,1255.93 279.66,1255.46 279.66,1003.93 6.13,1003.93 6.13,1255.77
GND:
  pour cut-out: 274,1260 273.53,1259.53 273.53,1008 0,1008 0,1259.84
POWER:
  pour cut-out: 274,1260 273.53,1259.53 273.53,1008 0,1008 0,1259.84
Bottom Layer:
  pour cut-out: 274,1260 273.53,1259.53 273.53,1008 0,1008 0,1259.84

## Silkscreen, mask and mechanical layers (free items; w line width, h text height)
Top Overlay:
  lines w10: 5.45,100.52 1032.47,100.52
Bottom Overlay:
  text "TH-watch V2.2" at 533.24,1133 h78.74
  text "TXH 21.4.12" at 440.95,1066.19 h60
  text "TH-watch V2.2" at 135,490.94 h78.74 r90
  text "TXH 21.4.12" at 196.27,380 h60 r90
  text "DD" at 355.24,331.18 h60
  text "DC" at 355.24,282 h60
  text "RS" at 355.24,227 h60
  text "SC" at 360.76,175 h60
  text "SD" at 360.76,124.44 h60
  text "VDD" at 360.76,72 h60
  text "GND" at 360.76,23 h60